# EAGLE board layout sensor (EAGLE 7.1.0)
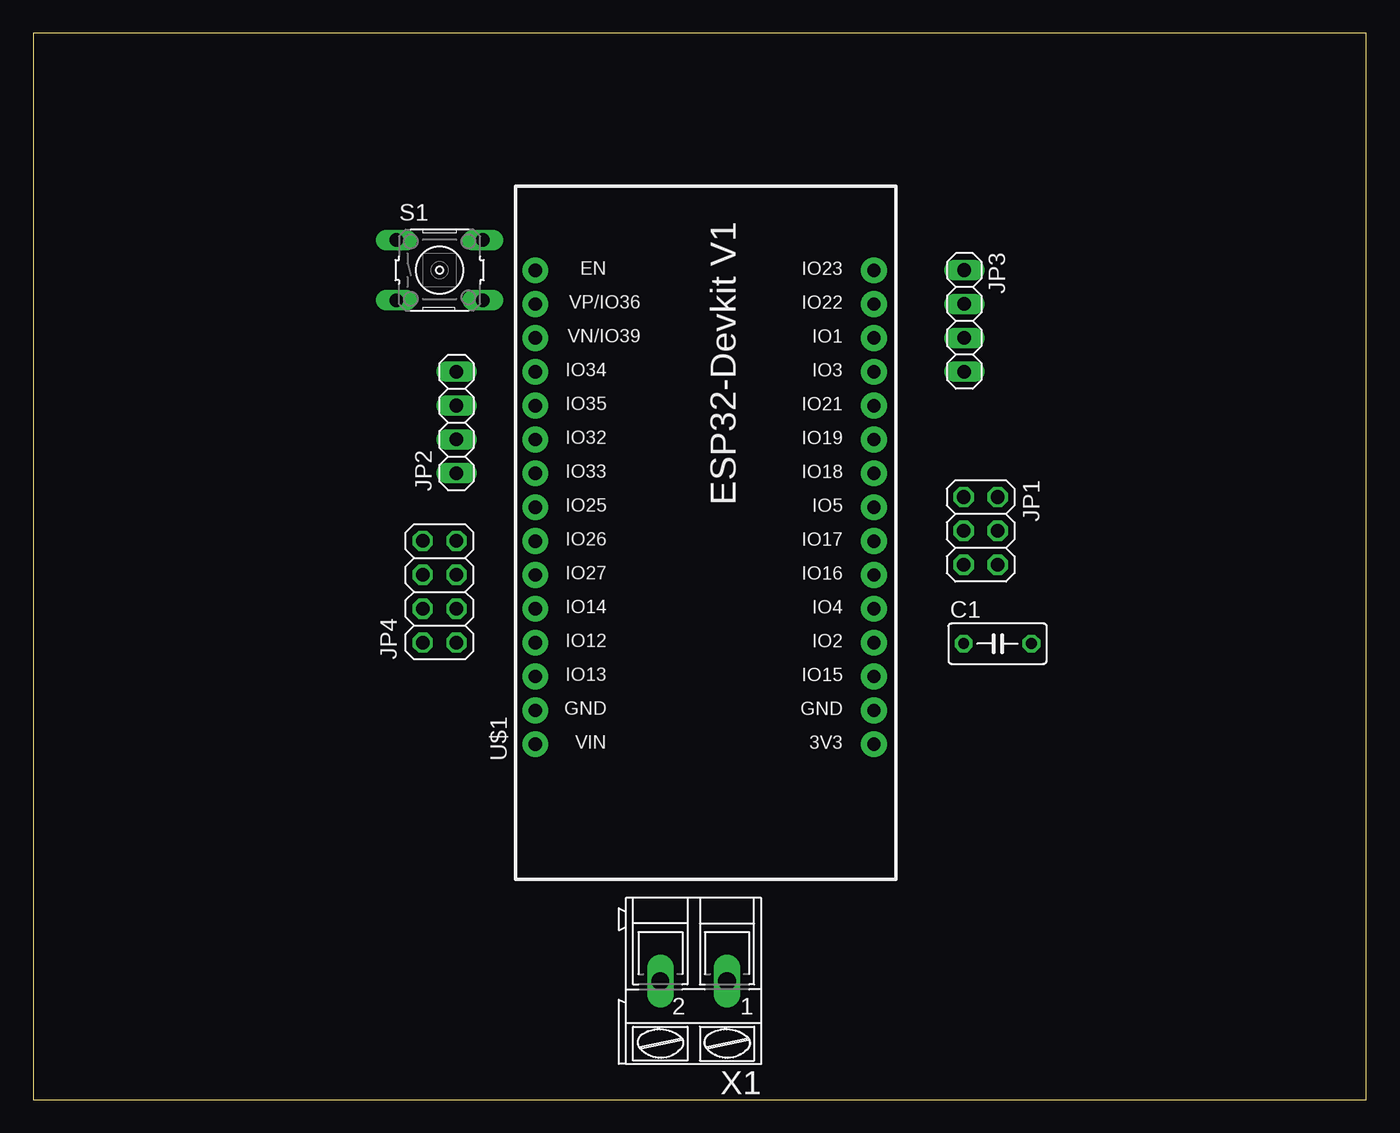
[diagram p0: board, top side]
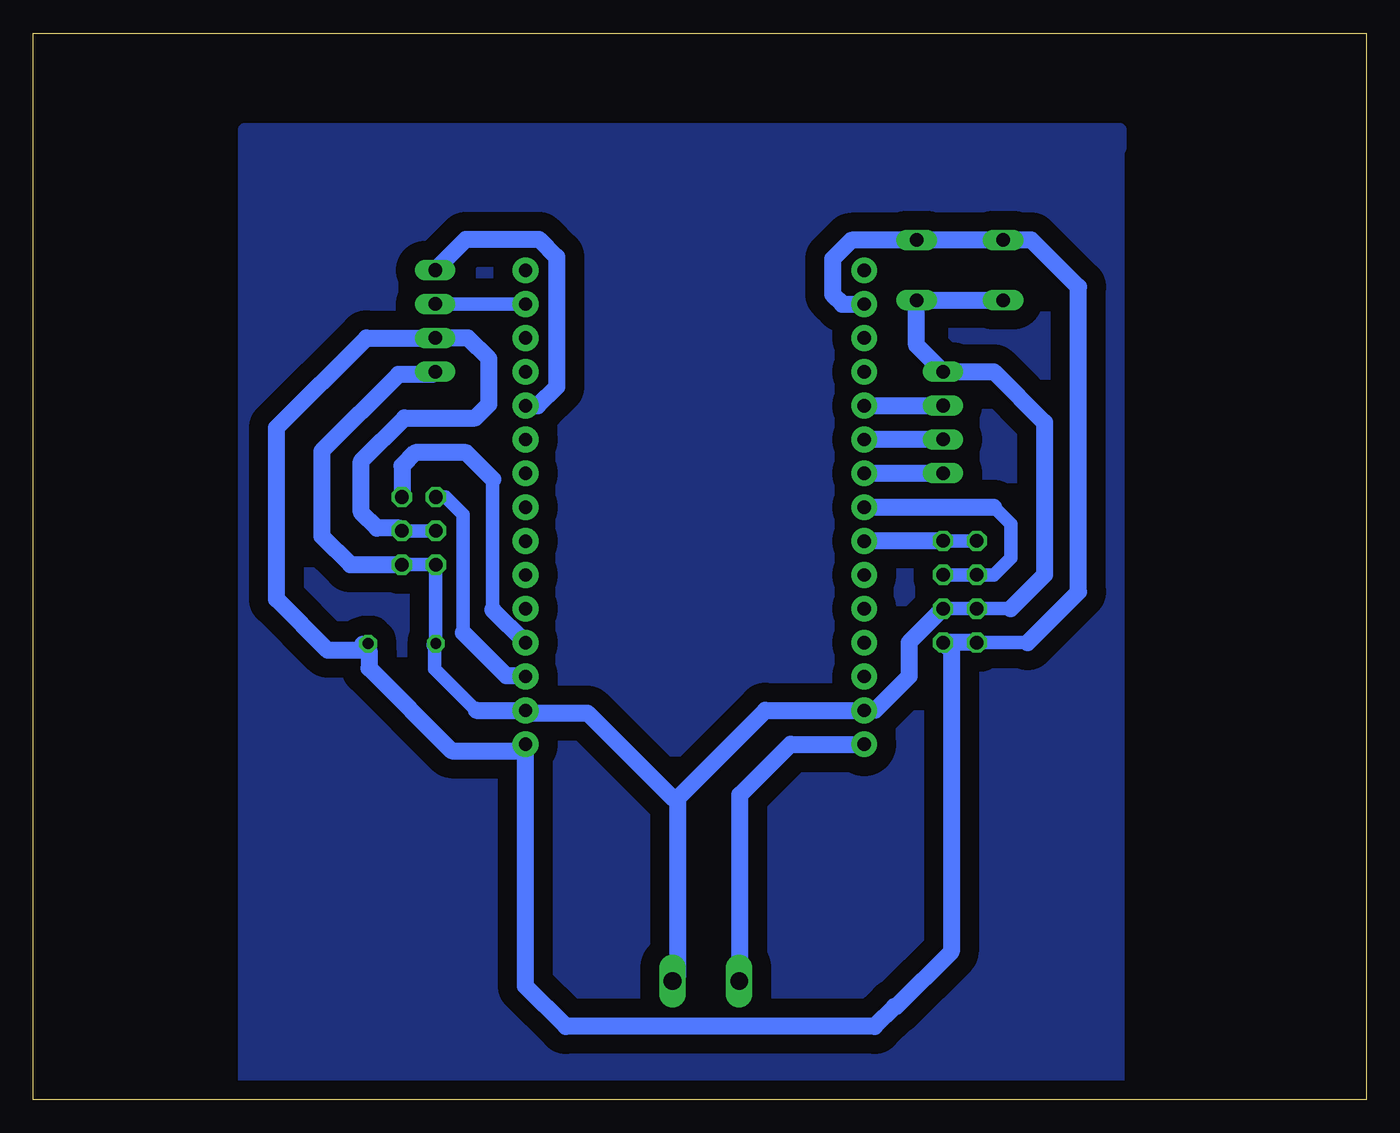
[diagram p1: board, bottom side, seen from below]

Size 100 x 80 mm. Coordinates in mm from the lower left corner, seen from the top.
Outline: 0,0 100,0 100,80 0,80 0,0
Copper layers (1*16): Top 0.035mm / dielectric 1.5mm / Bottom 0.035mm
Design rules "default": minimum track width 10mil, minimum drill 24mil, track to track 8mil, track to pad 8mil, pad to pad 8mil, via to via 8mil, smd to smd 8mil, copper to edge 40mil, drill to drill 8mil, minimum pad ring 10mil, minimum via ring 8mil, stop-mask expansion 4mil, vias tented up to drill 0mil, thermal gap 10mil

## Footprints (pad centres in the part's own frame; a part is rotated, then mirrored left to right if it is on the bottom)
C050-030X075 = drill 0.813 octagon: 1 -2.54,0; 2 2.54,0
2X03 = drill 1.016 octagon: 1 -2.54,-1.27; 2 -2.54,1.27; 3 0,-1.27; 4 0,1.27; 5 2.54,-1.27; 6 2.54,1.27
1X04 = drill 1.016 long: 1 -3.81,0; 2 -1.27,0; 3 1.27,0; 4 3.81,0
2X04 = drill 1.016 octagon: 1 -3.81,-1.27; 2 -3.81,1.27; 3 -1.27,-1.27; 4 -1.27,1.27; 5 1.27,-1.27; 6 1.27,1.27; 7 3.81,-1.27; 8 3.81,1.27
B3F-10XX = drill 1.016 long: 1 -3.251,2.261; 2 3.251,2.261; 3 -3.251,-2.261; 4 3.251,-2.261
ESP32-DEVKITV1 = drill 1 pad 1.93: 3V3 -16.52,-12.27; D1 13.96,-12.27; D2 -8.9,-12.27; D3 11.42,-12.27; D4 -6.36,-12.27; D5 1.26,-12.27; D12 -8.9,13.135; D13 -11.44,13.135; D14 -6.36,13.135; D15 -11.44,-12.27; D16 -3.82,-12.27; D17 -1.28,-12.27; D18 3.8,-12.27; D19 6.34,-12.27; D21 8.88,-12.27; D22 16.5,-12.27; D23 19.04,-12.27; D25 1.26,13.135; D26 -1.28,13.135; D27 -3.82,13.135; D32 6.34,13.135; D33 3.8,13.135; D34 11.42,13.135; D35 8.88,13.135; D36 16.5,13.135; D39 13.96,13.135; EN 19.04,13.135; GND@1 -13.98,13.135; GND@2 -13.98,-12.27; VIN -16.52,13.135
AK300/2 = drill 1.321 long: 1 -2.515,0; 2 2.489,0

## Placement (x,y rotation side)
C1  [C050-030X075]  72.34,34.21 0 top
JP1  [2X03]  71.08,42.67 270 top
JP2  [1X04]  31.75,50.8 90 top
JP3  [1X04]  69.85,58.42 270 top
JP4  [2X04]  30.48,38.1 90 top
S1  [B3F-10XX]  30.48,62.23 0 top
U$1  ESP32DEVKITV1  [ESP32-DEVKITV1]  50.8,43.18 90 top
X1  [AK300/2]  49.53,8.89 180 top

## Library data of the parts
C1 = rcl; SPICEPREFIX: C
JP1-JP4 = pinhead
S1 = switch-omron; MPN: B3F-1000; OC_FARNELL: 176432; OC_NEWARK: 36M3542
U$1 = esp32-devkitv1
X1 = con-ptr500; OC_FARNELL: unknown; OC_NEWARK: unknown

## Nets
GND: C1.1 JP1.5 JP1.6 JP2.4 JP3.4 JP4.3 JP4.4 S1.3 S1.4 U$1.GND@1 U$1.GND@2 X1.1
MOISTURE: JP1.2 U$1.D2
OUT1: JP2.1 U$1.D33
OUT2: JP2.2 U$1.D32
OUT3: JP2.3 U$1.D35
PH: JP1.1 U$1.D15
SCL: JP3.2 U$1.D22
SCL2: JP4.5 JP4.6 U$1.D25
SDA: JP3.1 U$1.D21
SDA2: JP4.7 JP4.8 U$1.D26
V: C1.2 JP1.3 JP1.4 JP3.3 JP4.1 JP4.2 S1.1 S1.2 U$1.3V3 U$1.D36
VIN: U$1.VIN X1.2

## Tracks (layer width: path | path; a pad name or v marks a point on that pad's centre or on a via)
GND
  Bottom 1.016: JP4.3 JP4.4 26.67,36.83 | 69.88,34.13 69.88,32.31 66.77,29.2 | C1.1 JP1.5 JP1.6
  Bottom 1.27: S1.3 S1.4 33.73,56.59 JP2.4 27.94,54.61 24.13,50.8 24.13,39.37 26.67,36.83 | JP4.3 34.29,34.29 34.29,31.75 36.84,29.2 U$1.GND@1 45.07,29.2 51.63,22.64 | X1.1 51.63,9.3 51.63,22.64 | 51.63,22.64 52.06,22.64 58.42,29 62.87,29 U$1.GND@2 66.77,29.2 | 69.88,34.13 C1.1 | JP3.4 70.06,54.4 72.6,54.4 78.36,48.64 78.36,42.28 76.21,40.13 JP1.6
MOISTURE
  Bottom 1.016: 65.53,36.74 65.53,46.54
  Bottom 1.27: U$1.D2 65.53,36.74 | 65.53,46.54 67.52,48.53 71.36,48.53 72.35,47.54 JP1.2
N$1
  pour Bottom (isolate 1.422, rank 5): 18.63,71.12 18.63,0 84.14,0 84.14,72.75 18.48,72.75 18.48,71.42
OUT1
  Bottom 1.27: JP2.1 U$1.D33
OUT2
  Bottom 1.27: JP2.2 U$1.D32
OUT3
  Bottom 1.27: U$1.D35 JP2.3
PH
  Bottom 1.016: 67.74,35.03 67.74,43.89 69.06,45.21 JP1.1
  Bottom 1.27: U$1.D15 63.12,31.79 64.5,31.79 67.74,35.03
SCL
  Bottom 1.016: U$1.D22 JP3.2
  Bottom 1.27: U$1.D22
SCL2
  Bottom 1.016: JP4.5 JP4.6 27.94,39.37 26.67,40.64 26.67,43.18 27.94,44.45
  Bottom 1.27: U$1.D25 27.94,44.45
SDA
  Bottom 1.27: JP3.1 67.54,64.54 62.07,64.54 60.74,63.21 60.74,53.48 62.16,52.06 U$1.D21
SDA2
  Bottom 1.016: JP4.8 JP4.7
  Bottom 1.27: JP4.7 U$1.D26
V
  Bottom 1.016: JP4.1 25.4,34.29 | JP1.4 JP1.3
  Bottom 1.27: JP4.2 JP4.1 31.12,33.66 31.12,11.1 35.27,6.96 35.4,6.96 36.88,5.48 60.03,5.48 63.07,8.51 63.07,26.16 | 25.4,34.29 21.59,38.1 21.59,60.96 25.12,64.49 S1.1 27.33,64.39 27.35,64.39 27.45,64.49 S1.2 33.76,64.47 38.63,64.47 40.03,63.06 40.03,60.41 39.3,59.68 U$1.D36 | 63.07,26.16 U$1.3V3 | JP1.4 72.55,42.87 74.22,42.87 75.41,44.05 75.41,47.89 72.15,51.15 66.84,51.15 65.81,52.18 65.81,55.58 67.38,57.15 JP3.3 75.01,57.15 81.75,50.41 81.75,37.54 77.92,33.7 75.39,33.7 C1.2 74.95,34.15 75.26,34.15 74.82,33.7 74.82,32.37 68.61,26.16 63.07,26.16
VIN
  Bottom 1.27: X1.2 46.99,8.94 46.99,22.86 43.19,26.66 U$1.VIN